# EAGLE board EmergencyStop - Rev A2 (EAGLE 7.7.0)
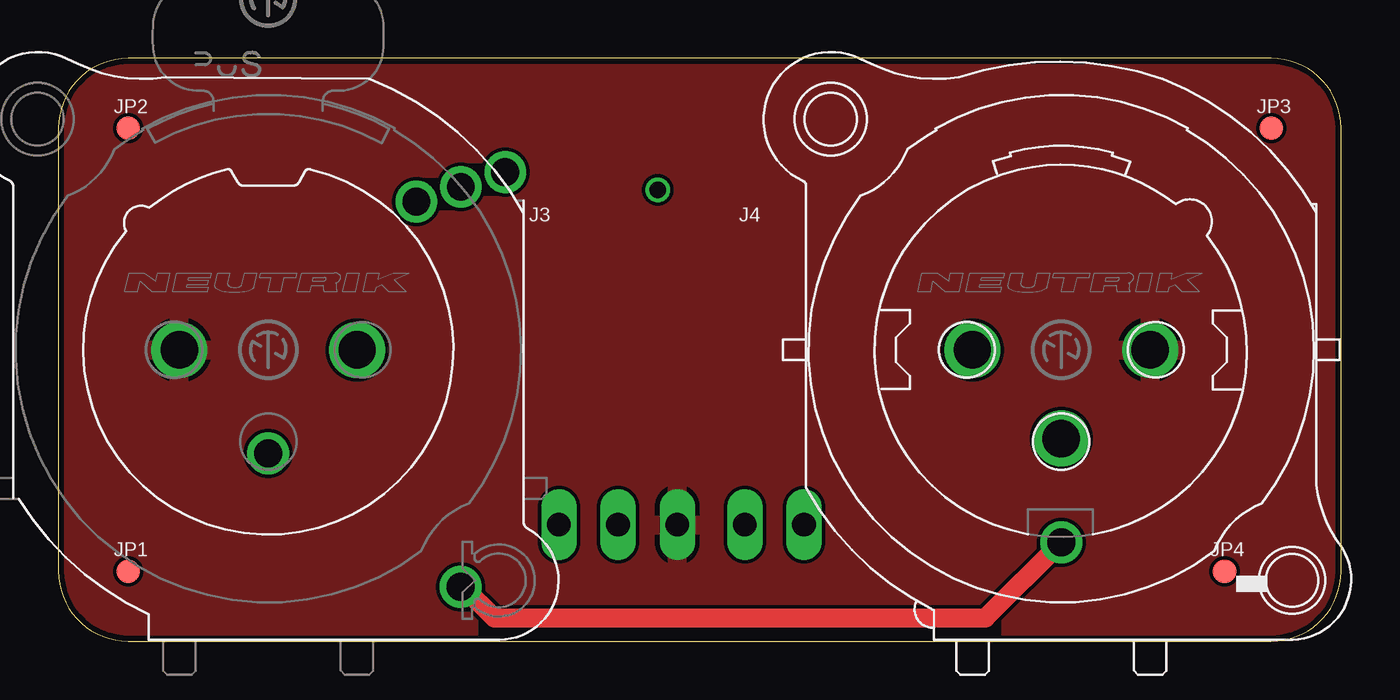
[diagram p0: board, top side]
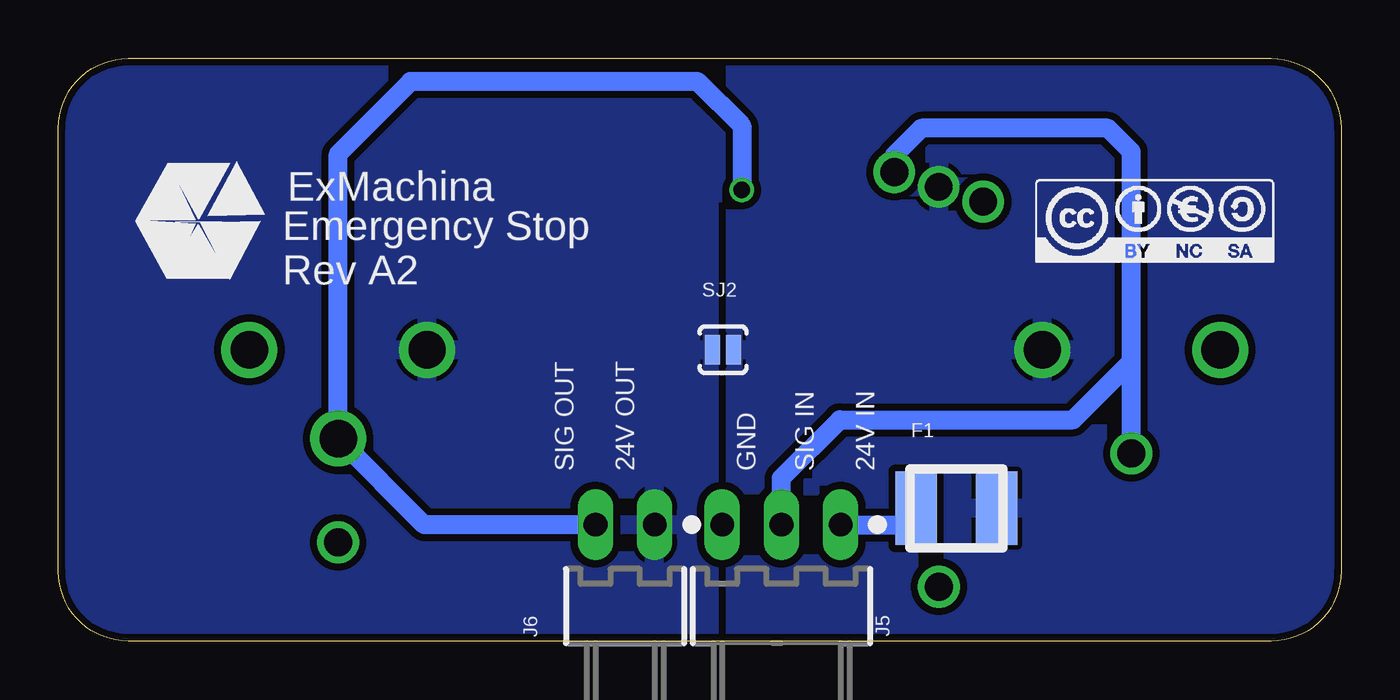
[diagram p1: board, bottom side, seen from below]

Size 55 x 25 mm. Coordinates in mm from the lower left corner, seen from the top.
Outline: 0,22 0,3 arc90 3,0 52,0 arc90 55,3 55,22 arc90 52,25 3,25 arc90 0,22
Copper layers (1*16): Top 0.018mm / dielectric 1.55mm / Bottom 0.018mm
Design rules "eC_2Layer_PClass6_BaseCopperO18_eCDefault *": minimum track width 0.15mm, minimum drill 0.35mm, track to track 0.15mm, track to pad 0.15mm, pad to pad 0.15mm, via to via 0.15mm, smd to smd 0mil, copper to edge 0.25mm, drill to drill 0.35mm, minimum pad ring 0.175mm, minimum via ring 0.125mm, stop-mask expansion 0mil, vias tented up to drill 0.45mm, thermal gap 0.2mm
Net classes: 0 default: width 0.813 mm, drill 0.35 mm

## Footprints (pad centres in the part's own frame; a part is rotated, then mirrored left to right if it is on the bottom)
LITTLEFUSE_SMD = smd 1.78 x 3.15: 1 -1.725,0; 2 1.725,0
NC3FBV2-SW = drill 1.6: 1 3.81,0; 2 -3.81,0 | drill 1.2: 3 0,-4.45; G 8.25,-10.16 | drill 1.194: C 8.255,6.985; NC 6.35,6.35; NO 10.16,7.62
NC3MAV = drill 1.6: 1 -3.81,0; 2 3.81,0; 3 0,-3.81 | drill 1.2: G 0,-8.255
7395-03 = drill 1.016 long: 1 2.54,0; 2 0,0; 3 -2.54,0
7395-02 = drill 1.016 long: 1 1.27,0; 2 -1.27,0
FIDUCIAL-1X2 = smd 1 x 1: 1 0,0
SJ_2S-NO = smd 0.635 x 1.27: 1 -0.45,0; 2 0.45,0

## Placement (x,y rotation side)
CC1  CC-BY-NC-SA  [CC-BY-NC-SA]  8,18 0 bottom
F1  1812L110/24DR  [LITTLEFUSE_SMD]  16.5,5.7 0 bottom
J3  NC3FBV2-SW  [NC3FBV2-SW]  9,12.5 0 top
J4  NC3MAV  [NC3MAV]  43,12.5 0 top
J5  22-05-7038-03  [7395-03]  24,5 0 bottom
J6  22-05-7028-02  [7395-02]  30.7,5 0 bottom
JP1  FIDUCIAL1X2  [FIDUCIAL-1X2]  3,3 0 top
JP2  FIDUCIAL1X2  [FIDUCIAL-1X2]  3,22 0 top
JP3  FIDUCIAL1X2  [FIDUCIAL-1X2]  52,22 0 top
JP4  FIDUCIAL1X2  [FIDUCIAL-1X2]  50,3 0 top
SJ2  SOLDERJUMPERNO  [SJ_2S-NO]  26.5,12.5 180 bottom
T1  EXMACHINA-LOGO-NAME  [EXM-LOGO-BASELINE]  49,18 0 bottom
U$1  [A4L-LOC]  -95,-71 0 top  (outside the outline)

## Library data of the parts
CC1 = cc-by-sa
F1 = fuse2
J3 = con-neutrik_ag
J4 = con-neutrik_ag; MF: FARNELL; MPN: NC3MAV; OC_FARNELL: 724531; OC_NEWARK: 46WX3058
J5 = con-molex; OC_FARNELL: 9731610; OC_NEWARK: unknown
J6 = con-molex; OC_FARNELL: 9731601; OC_NEWARK: unknown
JP1-JP4 = SparkFun
SJ2 = SparkFun-Passives
T1 = exmachina
U$1 = frames

## Nets
+24V_IN: F1.2 J3.1 J3.C SJ2.1
+24V_IN2: F1.1 J5.1
+24V_OUT: J4.1 J6.1 SJ2.2
GND: J3.2 J4.2 J5.3
GND_MECA: J3.G J4.G
SIG_IN: J3.3 J3.NO J5.2
SIG_OUT: J4.3 J6.2

## Tracks (layer width: path | path; a pad name or v marks a point on that pad's centre or on a via)
+24V_IN
  pour Bottom (isolate 0.305): -9,31 26,31 26,-6 -9,-6
+24V_IN2
  Bottom 0.813: J5.1 18.93,5 F1.1
+24V_OUT
  pour Bottom (isolate 0.305, rank 2): 65,31 26,31 26,-6 65,-6
GND
  pour Top: -10,32 66,32 66,-7 -10,-7
GND_MECA
  Top 0.813: J3.G 17.36,2.34 18.7,1 39.76,1 J4.G
SIG_IN
  Bottom 0.813: J3.3 9,12 | 9,12 9,21 10,22 18,22 19.16,20.84 J3.NO | J5.2 24,7 21.5,9.5 11.5,9.5 9,12
SIG_OUT  (via drill 0.7)
  Bottom 0.813: v25.7,19.36 25.7,22.1 27.6,24 39.9,24 43,20.9 J4.3 39.31,5 J6.2

## Text on the board
bPlace: Emergency Stop / Rev A2 | 24V IN | SIG IN | GND | 24V OUT | SIG OUT